# Altium PCB DS141-1.1-C循环式二氧化碳.PcbDoc
Units mm, origin at the board's own origin, x right, y up, seen from the top; angles counter-clockwise.
Board outline 16 x 41.91 mm, 2 copper layers (Top Layer, Bottom Layer); 2 components, 63 nets, 24 pads, 0 vias.
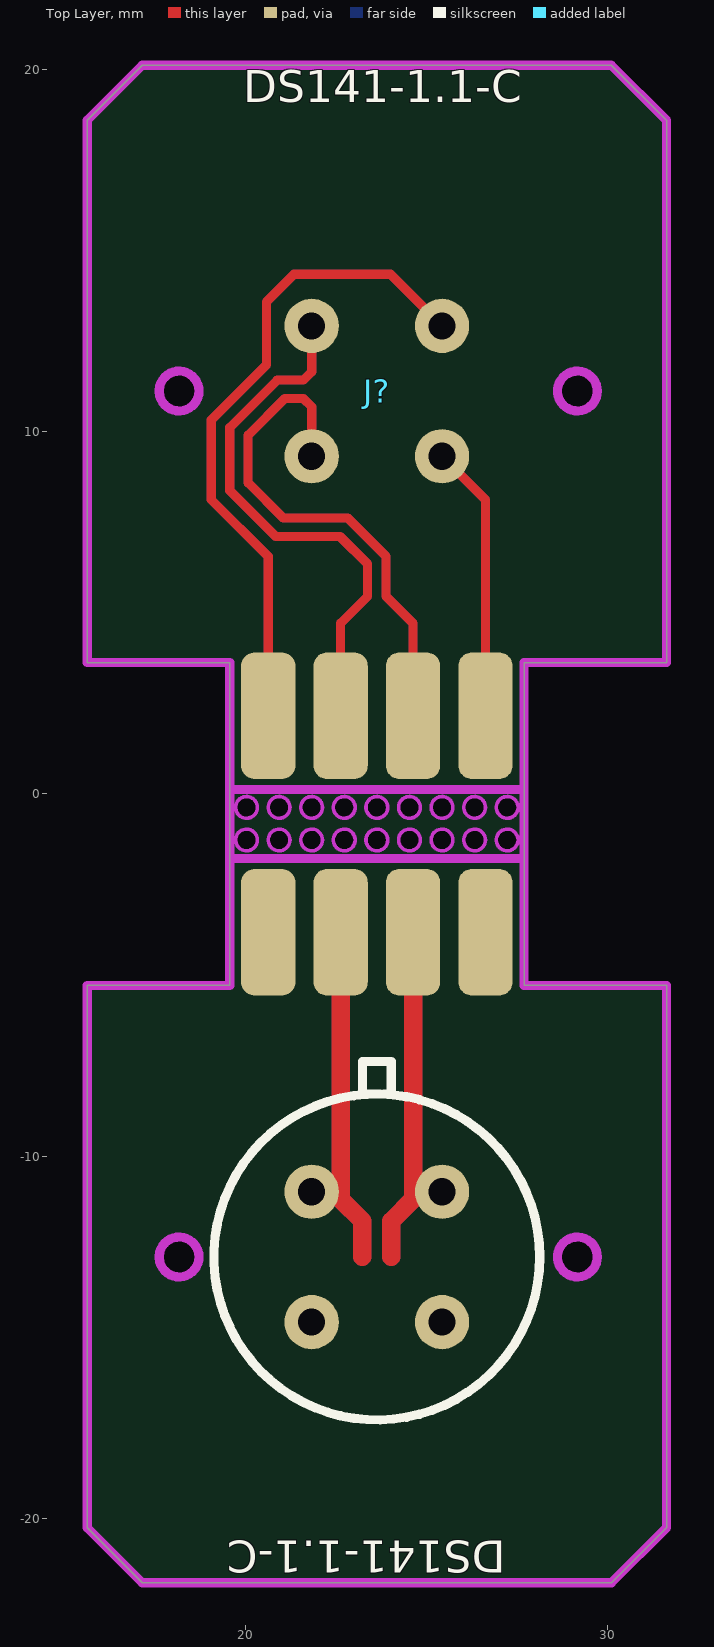
[diagram p0: Top Layer view]
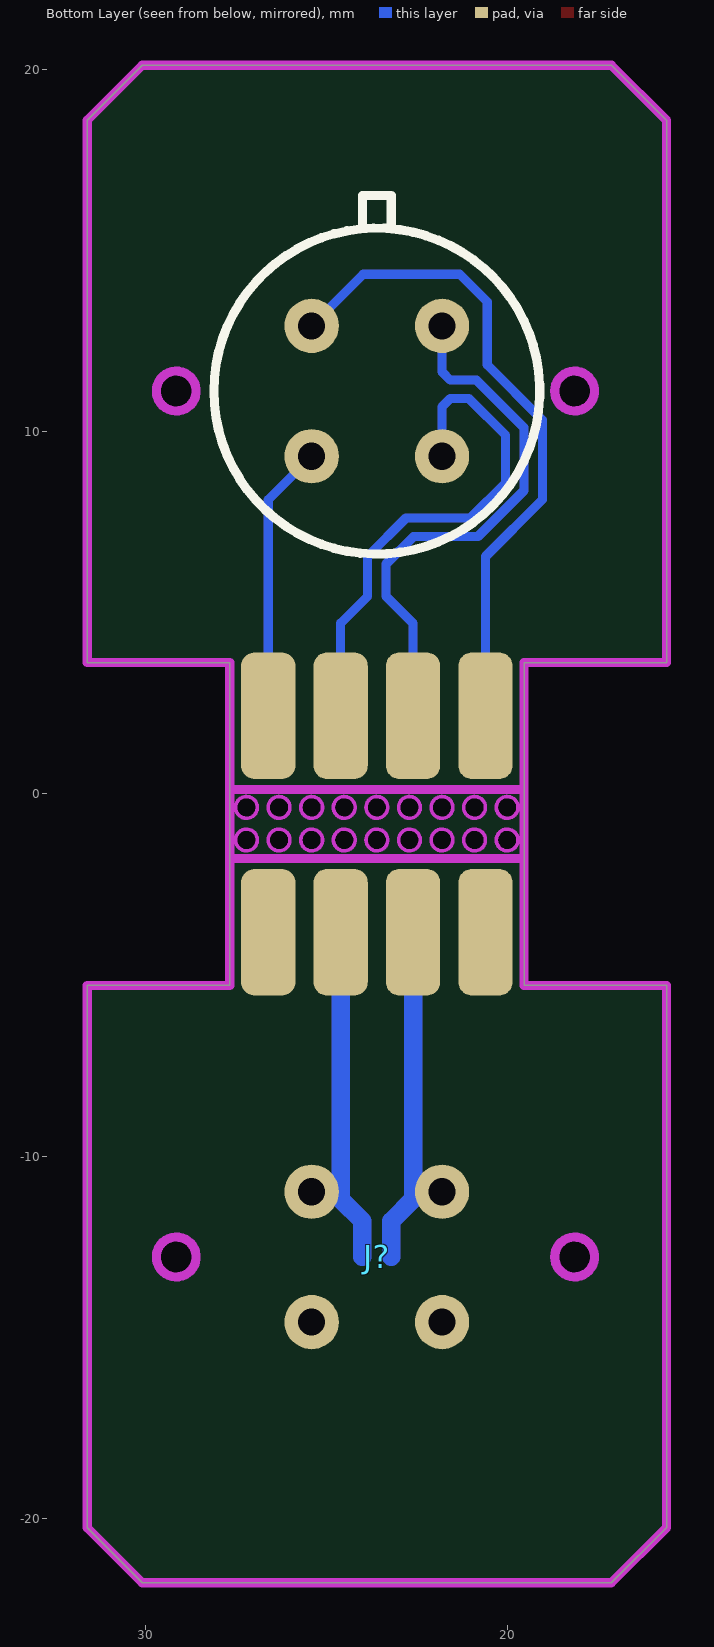
[diagram p1: Bottom Layer view, seen from below]

## Layer stack, top to bottom
Top Solder: solder mask 0.0102, Solder Resist, Dk 3.5
Top Layer: signal copper 0.0356
Dielectric 1: dielectric 0.32, FR-4, Dk 4.8
Bottom Layer: signal copper 0.0356
Bottom Solder: solder mask 0.0102, Solder Resist, Dk 3.5

## Board outline
15.622,-20.262 17.146,-21.786 30.1,-21.786 31.622,-20.264 31.622,-5.286 27.686,-5.286 27.686,3.627 31.622,3.627 31.622,18.603 30.098,20.127 17.144,20.127 15.622,18.605 15.622,3.627 19.558,3.627 19.558,-5.286 15.622,-5.286
cut-out: 19.722,-1.27 ccw(c20.022,-1.27) 20.022,-1.57 ccw(c20.022,-1.27) 20.322,-1.27 ccw(c20.022,-1.27) 20.022,-0.97 ccw(c20.022,-1.27)
cut-out: 19.722,-0.37 ccw(c20.022,-0.37) 20.022,-0.67 ccw(c20.022,-0.37) 20.322,-0.37 ccw(c20.022,-0.37) 20.022,-0.07 ccw(c20.022,-0.37)
cut-out: 20.622,-0.37 ccw(c20.922,-0.37) 20.922,-0.67 ccw(c20.922,-0.37) 21.222,-0.37 ccw(c20.922,-0.37) 20.922,-0.07 ccw(c20.922,-0.37)
cut-out: 21.522,-1.27 ccw(c21.822,-1.27) 21.822,-1.57 ccw(c21.822,-1.27) 22.122,-1.27 ccw(c21.822,-1.27) 21.822,-0.97 ccw(c21.822,-1.27)
cut-out: 20.622,-1.27 ccw(c20.922,-1.27) 20.922,-1.57 ccw(c20.922,-1.27) 21.222,-1.27 ccw(c20.922,-1.27) 20.922,-0.97 ccw(c20.922,-1.27)
cut-out: 21.522,-0.37 ccw(c21.822,-0.37) 21.822,-0.67 ccw(c21.822,-0.37) 22.122,-0.37 ccw(c21.822,-0.37) 21.822,-0.07 ccw(c21.822,-0.37)
cut-out: 22.422,-0.37 ccw(c22.722,-0.37) 22.722,-0.67 ccw(c22.722,-0.37) 23.022,-0.37 ccw(c22.722,-0.37) 22.722,-0.07 ccw(c22.722,-0.37)
cut-out: 23.322,-1.27 ccw(c23.622,-1.27) 23.622,-1.57 ccw(c23.622,-1.27) 23.922,-1.27 ccw(c23.622,-1.27) 23.622,-0.97 ccw(c23.622,-1.27)
cut-out: 22.422,-1.27 ccw(c22.722,-1.27) 22.722,-1.57 ccw(c22.722,-1.27) 23.022,-1.27 ccw(c22.722,-1.27) 22.722,-0.97 ccw(c22.722,-1.27)
cut-out: 23.322,-0.37 ccw(c23.622,-0.37) 23.622,-0.67 ccw(c23.622,-0.37) 23.922,-0.37 ccw(c23.622,-0.37) 23.622,-0.07 ccw(c23.622,-0.37)
cut-out: 24.222,-0.37 ccw(c24.522,-0.37) 24.522,-0.67 ccw(c24.522,-0.37) 24.822,-0.37 ccw(c24.522,-0.37) 24.522,-0.07 ccw(c24.522,-0.37)
cut-out: 25.122,-1.27 ccw(c25.422,-1.27) 25.422,-1.57 ccw(c25.422,-1.27) 25.722,-1.27 ccw(c25.422,-1.27) 25.422,-0.97 ccw(c25.422,-1.27)
cut-out: 24.222,-1.27 ccw(c24.522,-1.27) 24.522,-1.57 ccw(c24.522,-1.27) 24.822,-1.27 ccw(c24.522,-1.27) 24.522,-0.97 ccw(c24.522,-1.27)
cut-out: 25.122,-0.37 ccw(c25.422,-0.37) 25.422,-0.67 ccw(c25.422,-0.37) 25.722,-0.37 ccw(c25.422,-0.37) 25.422,-0.07 ccw(c25.422,-0.37)
cut-out: 26.922,-0.37 ccw(c27.222,-0.37) 27.222,-0.67 ccw(c27.222,-0.37) 27.522,-0.37 ccw(c27.222,-0.37) 27.222,-0.07 ccw(c27.222,-0.37)
cut-out: 26.022,-1.27 ccw(c26.322,-1.27) 26.322,-1.57 ccw(c26.322,-1.27) 26.622,-1.27 ccw(c26.322,-1.27) 26.322,-0.97 ccw(c26.322,-1.27)
cut-out: 26.922,-1.27 ccw(c27.222,-1.27) 27.222,-1.57 ccw(c27.222,-1.27) 27.522,-1.27 ccw(c27.222,-1.27) 27.222,-0.97 ccw(c27.222,-1.27)
cut-out: 26.022,-0.37 ccw(c26.322,-0.37) 26.322,-0.67 ccw(c26.322,-0.37) 26.622,-0.37 ccw(c26.322,-0.37) 26.322,-0.07 ccw(c26.322,-0.37)
cut-out: 17.611,-12.786 ccw(c18.161,-12.786) 18.161,-13.336 ccw(c18.161,-12.786) 18.711,-12.786 ccw(c18.161,-12.786) 18.161,-12.236 ccw(c18.161,-12.786)
cut-out: 28.611,-12.786 ccw(c29.161,-12.786) 29.161,-13.336 ccw(c29.161,-12.786) 29.711,-12.786 ccw(c29.161,-12.786) 29.161,-12.236 ccw(c29.161,-12.786)
cut-out: 28.611,-12.786 ccw(c29.161,-12.786) 29.161,-13.336 ccw(c29.161,-12.786) 29.711,-12.786 ccw(c29.161,-12.786) 29.161,-12.236 ccw(c29.161,-12.786)
cut-out: 17.611,11.127 ccw(c18.161,11.127) 18.161,10.577 ccw(c18.161,11.127) 18.711,11.127 ccw(c18.161,11.127) 18.161,11.677 ccw(c18.161,11.127)
cut-out: 28.611,11.127 ccw(c29.161,11.127) 29.161,10.577 ccw(c29.161,11.127) 29.711,11.127 ccw(c29.161,11.127) 29.161,11.677 ccw(c29.161,11.127)

## Design rules (kind name [scope] priority, off if disabled: settings)
Clearance [All] p1: gap=0.254 ignorepadtopadclearanceinfootprint=FALSE except(0: Arc-Hole Track-Hole SMDPad-Hole THPad-Hole Via-Hole Fill-Hole Poly-Hole Region-Hole Text-Hole)
PolygonConnect [All] p1: connectstyle=Relief reliefconductorwidth=0.254 reliefentries=4 polygonreliefangle="90 Angle" airgapwidth=0.254
RoutingVias [All] p1: holewidth=0.711 width=1.27 viastyle="Through Hole" minholewidth=0.711 minwidth=1.27 maxholewidth=0.711 maxwidth=1.27
SolderMaskExpansion [All] p1: expansion=0.102 istentingtop=FALSE
Width [All] p1: maxlimit=0.254 minlimit=0.254 preferedwidth=0.254
30 further rules are at their usual default settings.

## Components (designator, comment, footprint, x,y, rotation, side; value= is the part's Value field where it differs from the comment)
J? "SL000000029" "JX-CO2-2 A" 23.622,11.127 r0 top value=4P直针座
J? "SL000000027" "JX-CO2-2 A" 23.622,-12.786 r180 bottom value=2P直针座

## Footprints (in the part's own frame and the unit in brackets; to place one, negate y for a bottom-side part, rotate by r counter-clockwise, add the part's x,y. Pads: shape width x height; smd on the part's side, far side on the other; paste and mask are expansions set on the pad)
"JX-CO2-2 A" [mm]
  round 1.5 hole 0.75: 1(-1.8,1.8) 2(1.8,1.8) 3(-1.8,-1.8) 4(1.8,-1.8)

## Part data
J?: library part "XH2.54mm-4A 直针座", "4P直针座"
J?: library part "XH2.54mm-2A 直针座", "2P直针座"

## Free pads (board coordinates)
  rrect50% 1.5x3.5 smd: 1(26.622,-3.818) 2(20.622,2.159) 2(24.622,-3.818) 3(22.622,-3.818) 3(22.622,2.159) 3(24.622,2.159) 3(26.622,2.159) 4(20.622,-3.818)
  rrect50% 1.5x3.5 smd far side: 1(26.622,-3.818) 2(20.622,2.159) 2(24.622,-3.818) 3(22.622,-3.818) 3(22.622,2.159) 3(24.622,2.159) 3(26.622,2.159) 4(20.622,-3.818)

## Nets (pads, with @x,y where several pads share a name; then routed paths per layer and width w, separated by ;. In a path a pad name is that pad's centre, name@x,y a point inside that pad or via, vN(x,y) a via of type N, cw(c..) or ccw(c..) an arc to the next point about the centre after c; other vN are vias at no path point)
+: J?.1@25.422,-10.986 pad.2@24.622,-3.818 | length 18.4
  Top Layer w0.508: 24.022,-12.786 24.022,-11.792 24.622,-11.192 pad.2@24.622,-3.818
  Bottom Layer w0.508: 24.022,-12.786 24.022,-11.792 24.622,-11.192 pad.2@24.622,-3.818
-: J?.2@21.822,-10.986 pad.3@22.622,-3.818 | length 18.4
  Top Layer w0.508: pad.3@22.622,-3.818 22.622,-11.192 23.222,-11.792 23.222,-12.786
  Bottom Layer w0.508: pad.3@22.622,-3.818 22.622,-11.192 23.222,-11.792 23.222,-12.786
ADC0: 
ADC1: 
ADC8: 
AGND: 
D+_I/O1: 
D-_I/O2: 
DAC_OUT: 
Dis1_red_EN: 
Dis2_green_EN: 
Dis3_blue_EN: 
GND: 
I2C1_SCL: 
I2C1_SDA: 
KEY_HOME: 
NetB1_2: 
NetC10_1: 
NetC10_2: 
NetC12_1: 
NetC16_2: 
NetC17_1: 
NetC18_1: 
NetC18_2: 
NetC19_1: 
NetC19_2: 
NetC20_1: 
NetC22_1: 
NetC22_2: 
NetC25_1: 
NetJ2_2: 
NetQ1_1: 
NetQ2_1: 
NetQ2_3: 
NTC: J?.4@25.422,9.327 pad.3@26.622,2.159 | length 15.3
  Top Layer w0.254: J?.4@25.422,9.327 26.622,8.127 pad.3@26.622,2.159
  Bottom Layer w0.254: J?.4@25.422,9.327 26.622,8.127 pad.3@26.622,2.159
P3.0/D-/RxD: 
P3.1/D+/TxD: 
P3.3: 
PWM: 
REF: J?.1@21.822,12.927 pad.3@22.622,2.159 | length 30.1
  Top Layer w0.254: J?.1@21.822,12.927 21.822,11.662 21.59,11.43 20.872,11.43 19.558,10.116 19.558,8.382 20.828,7.112 22.606,7.112 23.368,6.35 23.368,5.461 22.622,4.715 pad.3@22.622,2.159
  Bottom Layer w0.254: J?.1@21.822,12.927 21.822,11.662 21.59,11.43 20.872,11.43 19.558,10.116 19.558,8.382 20.828,7.112 22.606,7.112 23.368,6.35 23.368,5.461 22.622,4.715 pad.3@22.622,2.159
REF_1V65: J?.2@25.422,12.927 pad.2@20.622,2.159 | length 36.9
  Top Layer w0.254: pad.2@20.622,2.159 20.622,6.556 19.05,8.128 19.05,10.327 20.574,11.851 20.574,13.589 21.336,14.351 23.998,14.351 J?.2@25.422,12.927
  Bottom Layer w0.254: pad.2@20.622,2.159 20.622,6.556 19.05,8.128 19.05,10.327 20.574,11.851 20.574,13.589 21.336,14.351 23.998,14.351 J?.2@25.422,12.927
SIG: J?.3@21.822,9.327 pad.3@24.622,2.159 | length 28.6
  Top Layer w0.254: J?.3@21.822,9.327 21.822,10.69 21.59,10.922 21.082,10.922 20.066,9.906 20.066,8.592 21.038,7.62 22.816,7.62 23.876,6.56 23.876,5.461 24.622,4.715 pad.3@24.622,2.159
  Bottom Layer w0.254: J?.3@21.822,9.327 21.822,10.69 21.59,10.922 21.082,10.922 20.066,9.906 20.066,8.592 21.038,7.62 22.816,7.62 23.876,6.56 23.876,5.461 24.622,4.715 pad.3@24.622,2.159
SPI1/SPI2_CS: 
SPI1_MISO: 
SPI1_MOSI: 
SPI1_SCK: 
SPI2_MISO: 
SPI2_MOSI: 
SPI2_SCK: 
UCAP: 
USART2_RXD: 
USART2_RXD2: 
USART2_TXD: 
USART2_TXD2: 
USB_D+: 
USB_D-: 
VBUS: 
VCC_3V3_ANA: 
VCC_3V3_MCU: 
VCC_3V3_MOTOR: 
VCC_5V: 
VCC_5V_ANA: 
VSS: 
pads on no net: J?.3@25.422,-14.586 J?.4@21.822,-14.586

## Keep-outs
Keep-Out Layer:
  circle w0.254: c18.161,-12.786 r0.55
  circle w0.254: c29.161,-12.786 r0.55
  circle w0.254: c29.161,11.127 r0.55
  circle w0.254: c18.161,11.127 r0.55
  circle w0.1: c20.022,-0.37 r0.3
  circle w0.1: c20.922,-0.37 r0.3
  circle w0.1: c21.822,-0.37 r0.3
  circle w0.1: c24.522,-0.37 r0.3
  circle w0.1: c23.622,-0.37 r0.3
  circle w0.1: c22.722,-0.37 r0.3
  circle w0.1: c27.222,-0.37 r0.3
  circle w0.1: c26.322,-0.37 r0.3
  circle w0.1: c25.422,-0.37 r0.3
  circle w0.1: c25.422,-1.27 r0.3
  circle w0.1: c26.322,-1.27 r0.3
  circle w0.1: c27.222,-1.27 r0.3
  circle w0.1: c22.722,-1.27 r0.3
  circle w0.1: c23.622,-1.27 r0.3
  circle w0.1: c24.522,-1.27 r0.3
  circle w0.1: c21.822,-1.27 r0.3
  circle w0.1: c20.922,-1.27 r0.3
  circle w0.1: c20.022,-1.27 r0.3
  lines w0.254: 19.558,-1.786 19.558,0.127 ; 19.558,-1.786 27.686,-1.786 ; 19.558,-1.786 19.558,-5.286 15.622,-5.286 15.622,-20.262 17.146,-21.786 30.1,-21.786 31.622,-20.264 31.622,-5.286 27.686,-5.286 27.686,-1.786 ; 19.558,0.127 27.686,0.127 ; 19.558,0.127 19.558,3.627 15.622,3.627 15.622,18.605 17.144,20.127 30.098,20.127 31.622,18.603 31.622,3.627 27.686,3.627 27.686,0.127 ; 27.686,-1.786 27.686,0.127

## Silkscreen, mask and mechanical layers (free items; w line width, h text height)
Top Overlay:
  text "DS141-1.1-C" at 19.939,18.813 h1.52
  text "DS141-1.1-C" at 27.178,-20.337 h1.52 r180
Mechanical 1:
  circle w0.254: c18.161,11.127 r0.55
  circle w0.254: c29.161,11.127 r0.55
  circle w0.254: c29.161,-12.786 r0.55
  circle w0.254: c18.161,-12.786 r0.55
  circle w0.1: c20.022,-1.27 r0.3
  circle w0.1: c20.922,-1.27 r0.3
  circle w0.1: c21.822,-1.27 r0.3
  circle w0.1: c24.522,-1.27 r0.3
  circle w0.1: c23.622,-1.27 r0.3
  circle w0.1: c22.722,-1.27 r0.3
  circle w0.1: c27.222,-1.27 r0.3
  circle w0.1: c26.322,-1.27 r0.3
  circle w0.1: c25.422,-1.27 r0.3
  circle w0.1: c25.422,-0.37 r0.3
  circle w0.1: c26.322,-0.37 r0.3
  circle w0.1: c27.222,-0.37 r0.3
  circle w0.1: c22.722,-0.37 r0.3
  circle w0.1: c23.622,-0.37 r0.3
  circle w0.1: c24.522,-0.37 r0.3
  circle w0.1: c21.822,-0.37 r0.3
  circle w0.1: c20.922,-0.37 r0.3
  circle w0.1: c20.022,-0.37 r0.3
  lines w0.254: 19.558,-1.786 27.686,-1.786 ; 19.558,-1.786 19.558,0.127 ; 19.558,-1.786 19.558,-5.286 15.622,-5.286 15.622,-20.262 17.146,-21.786 30.1,-21.786 31.622,-20.264 31.622,-5.286 27.686,-5.286 27.686,-1.786 ; 19.558,0.127 27.686,0.127 ; 19.558,0.127 19.558,3.627 15.622,3.627 15.622,18.605 17.144,20.127 30.098,20.127 31.622,18.603 31.622,3.627 27.686,3.627 27.686,0.127 ; 27.686,-1.786 27.686,0.127